# Altium PCB Sensor_Box_PWR_AC.PCBDOC
Units mm, origin at the board's own origin, x right, y up, seen from the top; angles counter-clockwise.
Board outline 33.95 x 73.05 mm, 2 copper layers (Top, Bot), stack 1.571 mm thick; 19 components, 18 nets, 61 pads, 36 vias.
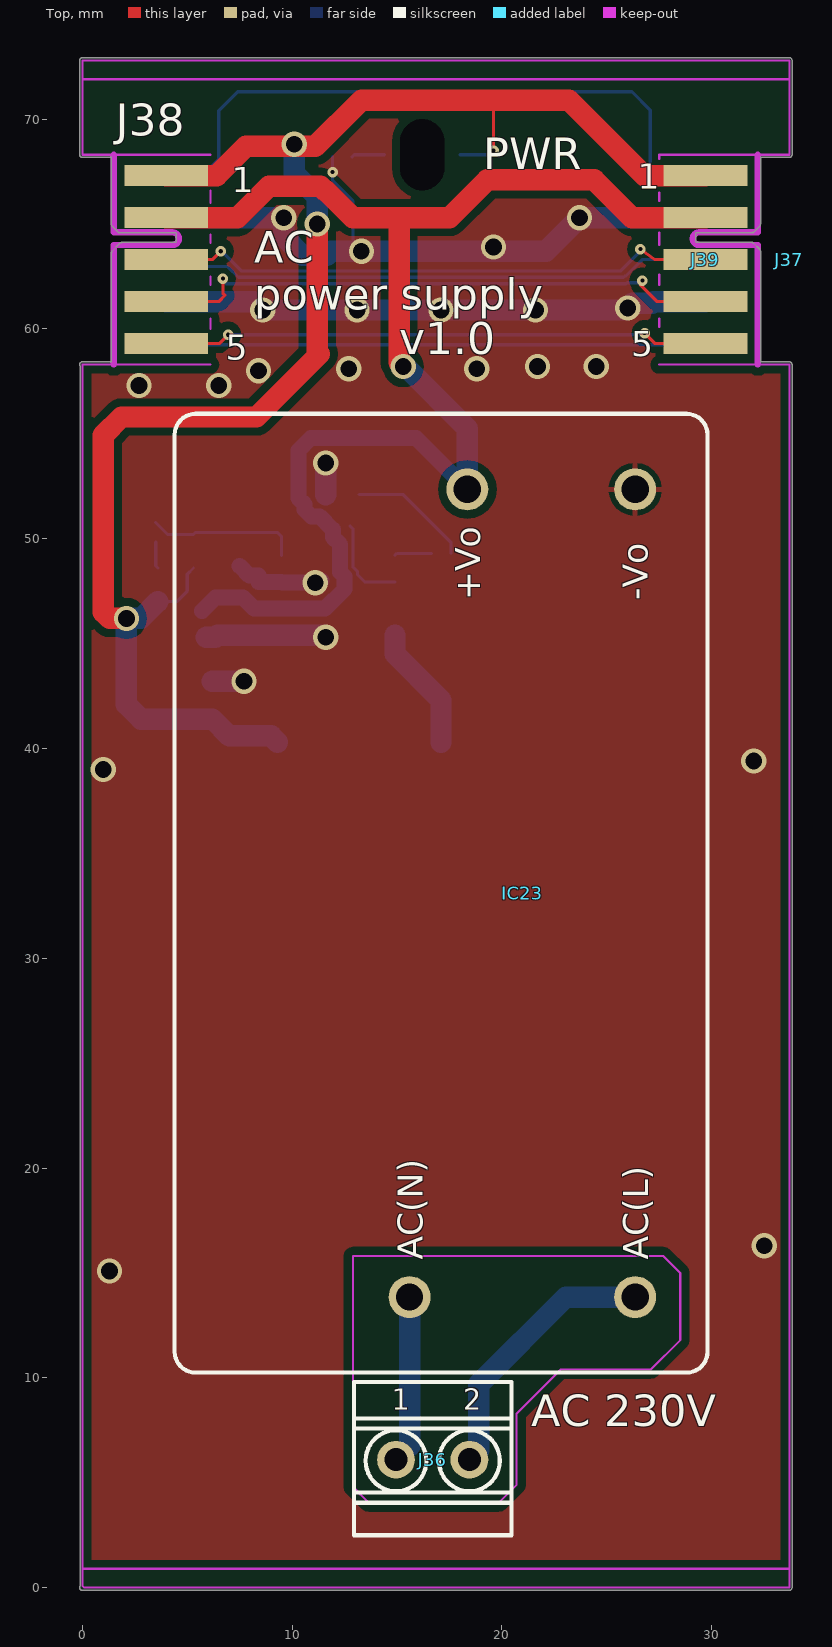
[diagram p0: Top view]
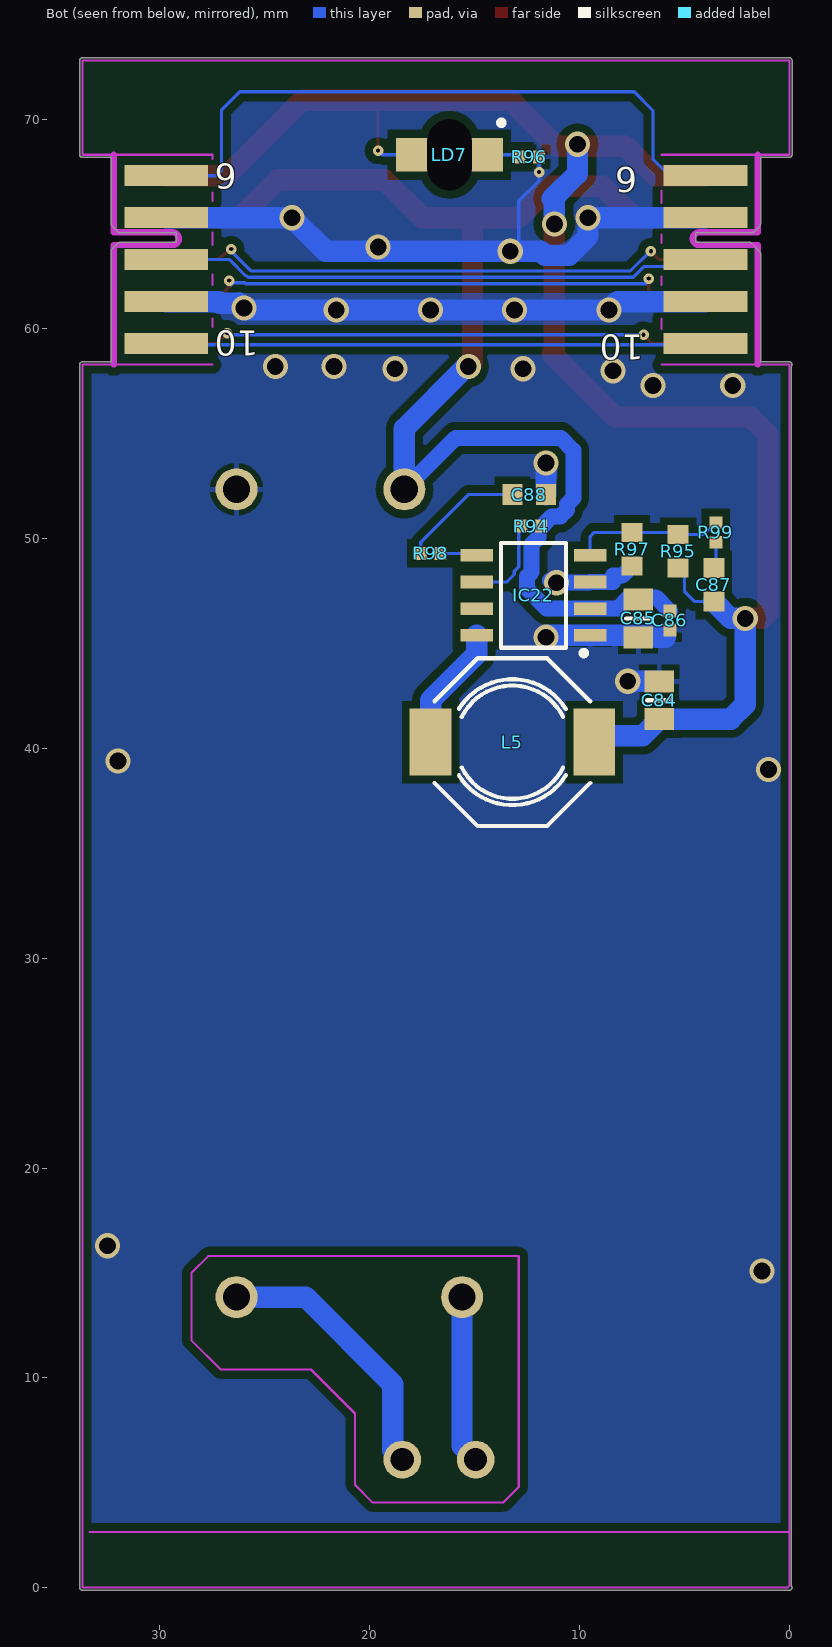
[diagram p1: Bot view, seen from below]
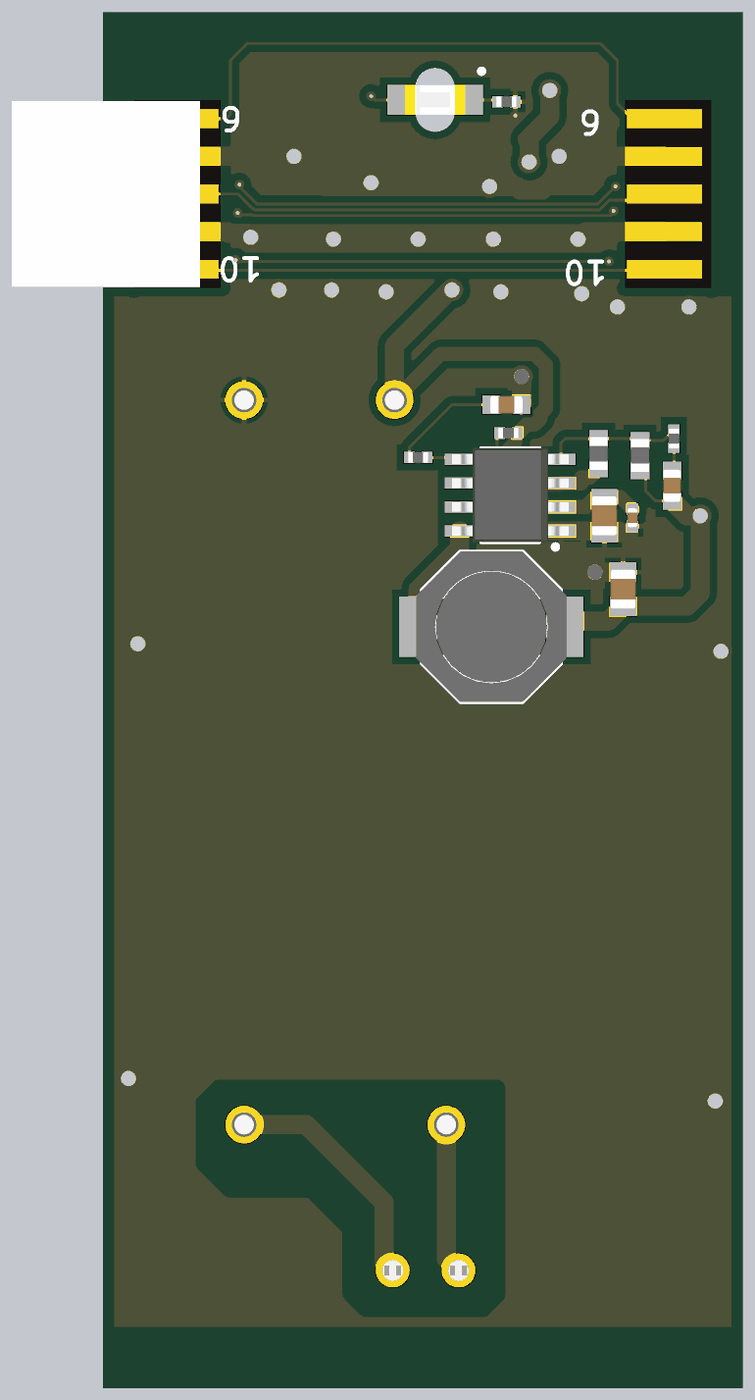
[diagram p2: 3D render of the assembled board from below, using the file's embedded part models]

## Layer stack, top to bottom
TopSolder: solder mask 0.0102, Solder Resist, Dk 3.5
Top: signal copper 0.0356
Dielectric1: core 1.5, FR-4, Dk 4.8
Bot: signal copper 0.0356
BottomSolder: solder mask 0.0102, Solder Resist, Dk 3.5

## Board outline
0,-0.127 cw(c0,0) -0.1,0.078 -0.1,58.222 cw(c0,58.3) 0,58.427 1.373,58.427 1.373,63.6 cw(c1.5,63.6) 1.41,63.69 1.81,64.09 1.809,64.09 cw(c1.9,64) 1.9,64.127 4.473,64.127 4.473,64.573 1.8,64.573 cw(c1.8,64.7) 1.709,64.61 1.71,64.61 1.41,64.91 1.41,64.909 cw(c1.5,65) 1.373,65 1.373,68.173 0,68.173 cw(c0,68.3) -0.127,68.3 -0.127,72.8 cw(c0,72.8) 0,72.927 33.7,72.927 cw(c33.7,72.8) 33.827,72.8 33.827,68.3 cw(c33.7,68.3) 33.7,68.173 32.327,68.173 32.327,65 cw(c32.2,65) 32.29,64.909 32.29,64.91 31.99,64.61 31.991,64.61 cw(c31.9,64.7) 31.9,64.573 29.227,64.573 29.227,64.127 31.9,64.127 cw(c31.9,64) 31.991,64.09 31.99,64.09 32.29,63.79 cw(c32.2,63.7) 32.327,63.7 32.327,58.427 33.7,58.427 cw(c33.7,58.3) 33.827,58.3 33.827,0 cw(c33.7,0) 33.7,-0.127

## Design rules (kind name [scope] priority, off if disabled: settings)
Clearance Clearance_DIFF [(InDifferentialPairClass('All Differential Pairs'))] p1: gap=0.127 ignorepadtopadclearanceinfootprint=FALSE except(0: Arc-Hole Track-Hole SMDPad-Hole THPad-Hole Via-Hole Fill-Hole Poly-Hole Region-Hole Text-Hole; 0.254: Arc-Poly Track-Poly SMDPad-Poly THPad-Poly Via-Poly Fill-Poly Poly-Poly Poly-Region Poly-Text)
Clearance [All] p2: gap=0.152 ignorepadtopadclearanceinfootprint=FALSE except(0.381: Arc-Poly Track-Poly SMDPad-Poly THPad-Poly Via-Poly Fill-Poly Poly-Poly)
DiffPairsRouting [All] p1: maxlimit=0.254 minlimit=0.127 mostfreqgap=0.127 toplayer_minwidth=0.127 toplayer_maxwidth=0.381 toplayer_prefwidth=0.254 bottomlayer_minwidth=0.127 bottomlayer_maxwidth=0.381 bottomlayer_prefwidth=0.254 maxuncoupledlength=12.7
FabricationTestPointUsage TestPointUsage [All] p1: valid=0 allowmultiple=FALSE
FabricationTestpoint Testpoint [All] p1: side=3 testpointundercomponent=TRUE minsize=1.016 maxsize=2.54 preferedsize=1.524 minholesize=0.508 maxholesize=1.016 preferedholesize=0.813 testpointgrid=0.025 allowsidetop=TRUE allowsidebottom=TRUE usegrid=TRUE gridtolerance=0
HoleSize [All] p1: absolutevalues=TRUE maxlimit=3.81 minlimit=0.025 maxpercent=80.000 minpercent=20.000
HoleToHoleClearance [All] p1: gap=0.025 allowstackedmicrovias=TRUE
MinimumSolderMaskSliver [All] p1: minsoldermaskwidth=0
PlaneClearance [All] p1: clearance=0.254
PlaneConnect [All] p1: planeconnectstyle=Direct reliefexpansion=0.508 reliefentries=4 reliefconductorwidth=0.254 reliefairgap=0.254
PolygonConnect PolygonConnect_pad [(InPadClass('All Pads'))] p1: connectstyle=Relief reliefconductorwidth=0.254 reliefentries=4 polygonreliefangle="90 Angle" airgapwidth=0.254
PolygonConnect [All] p2: connectstyle=Direct reliefconductorwidth=0.254 reliefentries=4 polygonreliefangle="45 Angle" airgapwidth=0.254
RoomDefinition Sensor_Box_PWR_AC [InComponentClass('Sensor_Box_PWR_AC')] p1 off: confinementstyle=ConfineIn formatcopy=TRUE lockcomponents=FALSE outline 81.85,15.15 264.599,15.15 264.599,38.9 81.85,38.9
RoutingVias [All] p1: holewidth=0.2 width=0.5 viastyle="Through Hole" minholewidth=0.2 minwidth=0.5 maxholewidth=0.8 maxwidth=1.3
SilkToSilkClearance [All] p1: silktosilkclearance=0
SilkToSolderMaskClearance SilkscreenOverComponentPads [IsPad] p1: minsilkscreentomaskgap=0 clearancetoexposedcopper=TRUE
SolderMaskExpansion [All] p1: expansion=0.051
Width [All] p1: maxlimit=1.27 minlimit=0.127 preferedwidth=0.127
20 further rules are at their usual default settings.

## Components (designator, comment, footprint, x,y, rotation, side; value= is the part's Value field where it differs from the comment)
C84 "10uF" CAPC2012X135N 6.2,42.3 r90 bottom
C85 "10uF" CAPC2012X135N 7.2,46.2 r90 bottom
C86 "100nF" CAPC1005X55N 5.7,46.1 r90 bottom
C87 "150pF" CAPC1608X87N 3.6,47.8 r270 bottom
C88 "3.9nF" CAPC1608X87N 12.4,52.1 r0 bottom
IC22 "NCP3170ADR2G" SOIC127P600X175-8N 12.2,47.3 r0 bottom
IC23 "IRM-10-12" PWS_MEANWELL_IRM-10 17.1,33.1 r90 top
J36 "=Family" PHOENIX_1751248 16.7,6.1 r0 top
J37 "=Family" "AVX_00 9159 010 061 916" 33.7,63.3 r0 top
J38 "=Family" EDGE10T1B6_P200W1000L0F100X400 4,67.3 r270 top
J39 "=Family" EDGE10T5B10_P200W1000L0F100X400 29.7,59.3 r90 top
L5 "6.8uH" IND_BOURNS_SRU8043 13.2,40.3 r180 bottom
LD7 "Green" LED_KINGBRIGHT_KPTR3216 16.2,68.3 r180 bottom
R94 "10k" RESC1005X40N 12.3,50.6 r0 bottom
R95 "43k" RESC1608X55N 5.3,49.4 r270 bottom
R96 "1k" RESC1005X40N 12.4,68.2 r0 bottom
R97 "8k2" RESC1608X55N 7.5,49.5 r270 bottom
R98 "10k" RESC1005X40N 17.1,49.3 r180 bottom
R99 "1k" RESC1005X40N 3.5,50.3 r270 bottom

## Footprints (in the part's own frame and the unit in brackets; to place one, negate y for a bottom-side part, rotate by r counter-clockwise, add the part's x,y. Pads: shape width x height; smd on the part's side, far side on the other; paste and mask are expansions set on the pad)
"AVX_00 9159 010 061 916" [mm] "10 Contacts, 2mm Pitch, Open Ended Card Edge Connector, 9159 Series"
  body extent -5,-4.95 5,4.95, height 1.7
CAPC1005X55N [mm] "Chip Capacitor, Body 1.0x0.55mm, IPC Medium Density"
  rect 0.62x0.62 smd: 1(-0.45,0) 2(0.45,0)
  body extent -0.52,-0.27 0.53,0.28, height 0.55
CAPC1608X87N [mm] "Chip Capacitor, Body 1.6x0.8mm IPC Medium Density"
  rect 0.95x1 smd: 1(-0.8,0) 2(0.8,0)
  body extent -0.87,-0.47 0.88,0.48, height 0.87
CAPC2012X135N [mm] "Chip Capacitor, Body 2.0x1.25mm, IPC Medium Density"
  rect 1.05x1.4 smd: 1(-0.9,0) 2(0.9,0)
  silkscreen extent 0,-0.58 0,0.58, body extent -1.05,-0.67 1.05,0.68, height 1.25
EDGE10T1B6_P200W1000L0F100X400 [mm] "10 contacts Board Edge Connector, First Left Top Pad 1, First Left Bottom Pad 2, Pitch 2mm, Length 0mm, Width 10mm, Finger Lenght 4mm, Finger Width 1mm"
  rect 1x4 smd paste-0.5: 1(0,0) 2(2,0) 3(4,0) 4(6,0) 5(8,0)
  rect 1x4 smd far side paste-0.5: 6(0,0) 7(2,0) 8(4,0) 9(6,0) 10(8,0)
  KeepOutLayer lines w0.3: 9,-2.5 3.3,-2.5 3.3,0.3 ccw(c3,0.3) 2.7,0.3 2.7,-2.5 -1,-2.5
EDGE10T5B10_P200W1000L0F100X400 [mm] "10 contacts Board Edge Connector, First Left Top Pad 5, First Left Bottom Pad 10, Pitch 2mm, Length 0mm, Width 10mm, Finger Lenght 4mm, Finger Width 1mm"
  rect 1x4 smd paste-0.5: 1(8,0) 2(6,0) 3(4,0) 4(2,0) 5(0,0)
  rect 1x4 smd far side paste-0.5: 6(8,0) 7(6,0) 8(4,0) 9(2,0) 10(0,0)
  KeepOutLayer lines w0.3: -1,-2.5 4.7,-2.5 4.7,0.3 cw(c5,0.3) 5.3,0.3 5.3,-2.5 9,-2.5
IND_BOURNS_SRU8043 [mm] "SMD Inductor Body Width 8.3mm Body Lenght 8.3mm Height 4.6mm"
  rect 2x3.2 smd: 1(-3.9,0) 2(3.9,0)
  silkscreen extent -3.71,-4 3.71,4, body extent -4,-4 4,4, height 4.3
LED_KINGBRIGHT_KPTR3216 [mm] "Reverse Mount LED 3216, Hole 2.1x2.3mm 0.35mm Height"
  rect 1.5x1.6 smd: 1(1.8,0) 2(-1.8,0)
  oval 1.9x3.2 hole 2.1 slot 3.4 at 90 deg unplated mask+0.1: 3(0,0)
  silkscreen extent 2.35,1.4 2.6,1.65, body extent -1.6,-0.8 1.6,0.8, height 0.25
PHOENIX_1751248 [mm] "Terminal Block, 10A 160V, Pitch 3.5mm, 2 Positions, Screw Connection"
  round 1.8 hole 1.1: 1(-1.75,0) 2(1.75,0)
  silkscreen extent -3.75,-3.6 3.75,3.7, body extent -3.75,-3.6 3.75,3.7, height 8.5
PWS_MEANWELL_IRM-10 [mm] "IRM-10 Series, Body 45.7x25.4mm, Power Supply"
  round 2 hole 1.3: 1(-19.25,1.5) 2(-19.25,-9.25) 3(19.25,-1.25) 4(19.25,-9.25)
  silkscreen extent -22.85,-12.7 22.85,12.7, body extent -22.85,-12.7 22.85,12.7, height 21.5
RESC1005X40N [mm] "Chip Resistor, EIA 0402, Metric 1005, Body 1.0x0.5mm, IPC Medium Density"
  rect 0.58x0.62 smd: 1(-0.47,0) 2(0.47,0)
  body extent -0.52,-0.27 0.53,0.28, height 0.4
RESC1608X55N [mm] "Chip Resistor, EIA 0603, Metric 1608, Body 1.6x0.8mm, IPC Medium Density"
  rect 0.9x1 smd: 1(-0.8,0) 2(0.8,0)
  body extent -0.87,-0.47 0.88,0.48, height 0.55
SOIC127P600X175-8N [mm] "SOIC 8, Pitch 1.27mm - Body 4x5mm, IPC Medium Density"
  rect 1.55x0.6 smd: 1(-2.7,1.905) 2(-2.7,0.635) 3(-2.7,-0.635) 4(-2.7,-1.905) 5(2.7,-1.905) 6(2.7,-0.635) 7(2.7,0.635) 8(2.7,1.905)
  silkscreen extent -2.52,-2.5 1.55,2.88, body extent -3.1,-2.5 3.1,2.5, height 1.75

## Part data
C84 C85: library part CC0805_10UF_16V_10%_X5R, "Non-polarised capacitor", Case=0805, Manufacturer=GENERIC, Manufacturer1 ComponentHeight=1.4mm, Manufacturer1 Example=KEMET, Manufacturer1 Part Number=C0805C106K4PAC, Tolerance=±10%, Voltage=16V, Author="CERN DEM JLC", Component Type=Standard, CreateDate=03.12.2007, HelpURL=\\cern.ch\dfs\Applications\Altium\Datasheets\CC1206_X5R_KEMET.pdf, LatestRevisionDate=03.12.2007, Manufacturer Part Number=CC0805_10UF_16V_10%_X5R, Mounted=Yes, Part Description="SMD Multilayer Chip Ceramic Capacitor", Part Number=CC0805_10UF_16V_10%_X5R, Pin Count=2, Sense=No, SMD=Yes, Socket=No, Status=Preferred, TC=X5R
C86: library part CC0402_100NF_16V_10%_X5R, "Non-polarised capacitor", Case=0402, Manufacturer=GENERIC, Manufacturer1 ComponentHeight=0.55mm, Manufacturer1 Example=MURATA, Manufacturer1 Part Number=GRM155R61C104KA88D, Tolerance=±10%, Voltage=16V, Author="CERN DEM JLC", Component Type=Standard, CreateDate=10.12.2013, HelpURL=\\cern.ch\dfs\Applications\Altium\Datasheets\CC0402_X5R_MURATA_GRM.pdf, LatestRevisionDate=10.12.2013, Manufacturer Part Number=CC0402_100NF_16V_10%_X5R, Mounted=Yes, Part Description="SMD Multilayer Chip Ceramic Capacitor", Part Number=CC0402_100NF_16V_10%_X5R, Pin Count=2, Sense=No, SMD=Yes, Socket=No, Status=None, TC=X5R
C87: library part CC0603_150PF_50V_1%_NP0, "Non-polarised capacitor", Case=0603, Manufacturer=GENERIC, Manufacturer1 ComponentHeight=0.7mm, Manufacturer1 Example=PHYCOMP, Manufacturer1 Part Number=CC0603FRNPO9BN151, Tolerance=±1%, Voltage=50V, Author="CERN DEM MR", Component Type=Standard, CreateDate=17.02.2016, HelpURL=\\cern.ch\dfs\Applications\Altium\Datasheets\CC0805_NP0_PHYCOMP_16VTO50V.pdf, LatestRevisionDate=17.02.2016, Manufacturer Part Number=CC0603_150PF_50V_1%_NP0, Mounted=Yes, Part Description="SMD Multilayer Chip Ceramic Capacitor", Part Number=CC0603_150PF_50V_1%_NP0, Pin Count=2, Sense=No, SMD=Yes, Socket=No, Status=None, TC=C0G/NP0
C88: library part CC0603_3.9NF_50V_5%_X7R, "Non-polarised capacitor", Case=0603, Manufacturer=GENERIC, Manufacturer1 ComponentHeight=0.87mm, Manufacturer1 Example=PHYCOMP, Manufacturer1 Part Number=223858615631, Tolerance=±5%, Voltage=50V, Author="CERN DEM JLC", Component Type=Standard, CreateDate=03.12.2007, HelpURL=\\cern.ch\dfs\Applications\Altium\Datasheets\CC0603_X7R_PHYCOMP.pdf, LatestRevisionDate=03.12.2007, Manufacturer Part Number=CC0603_3.9NF_50V_5%_X7R, Mounted=Yes, Part Description="SMD Multilayer Chip Ceramic Capacitor", Part Number=CC0603_3.9NF_50V_5%_X7R, Pin Count=2, Sense=No, SMD=Yes, Socket=No, Status=Preferred, TC=X7R
IC22: "Synchronous PWM Switching Converter", Case=SOIC8, Manufacturer="ON SEMICONDUCTOR", Author="CERN DEM MR", Bonding=No, ComponentHeight=1.75mm, Component Type=Standard, CreateDate=30.05.2016, Device=NCP3170ADR2G, HelpURL=\\cern.ch\dfs\Applications\Altium\Datasheets\NCP3170ADR2G.pdf, LatestRevisionDate=30.05.2016, Manufacturer Part Number=NCP3170ADR2G, Mounted=Yes, PackageDescription="SOIC 8, Pitch 1.27mm - Body 4x5mm, IPC Medium Density", Part Description="Synchronous PWM Switching Converter", Part Number=NCP3170ADR2G, Pin Count=8, PressFit=No, Sense=No, SMD=Yes, Socket=No
IC23: "Power Supply", Manufacturer="MEAN WELL", Author="CERN DEM MR", Bonding=No, ComponentHeight=21.5mm, Component Type=Standard, CreateDate=14.02.2018, Device=IRM-10-12, HelpURL=\\cern.ch\dfs\Applications\Altium\Datasheets\IRM-10-12.pdf, LatestRevisionDate=14.02.2018, Manufacturer Part Number=IRM-10-12, Mounted=Yes, PackageDescription="IRM-10 Series, Body 45.7x25.4mm, Power Supply", Part Description="85-264VAC To 12VDC (850mA) 10.2W Power Supply", Part Number=IRM-10-12, Pin Count=4, PressFit=No, Sense=No, SMD=No, Socket=No, Status=None
J36: library part PHOENIX_1751248, "Terminal Block, 2 Positions, Screw Connection", Manufacturer="PHOENIX CONTACT", Manufacturer Part Number="1751248 (MKDS 1/ 2-3,5)", Author="CERN DEM JLC", ComponentHeight=8.5mm, Component Type=Standard, CreateDate=03.11.2009, HelpURL=\\cern.ch\dfs\Applications\Altium\Datasheets\PHOENIX_1751248.pdf, LatestRevisionDate=26.04.2010, Mounted=Yes, Part Description="10A 160V, Terminal Block, Pitch 3.5mm, 2 Positions, Screw Connection", Part Number=PHOENIX_1751248, Pin Count=2, PressFit=No, Sense=No, SMD=No, Socket=No, Status=None
J37: library part "AVX_00 9159 010 061 916", "Open Ended Card Edge Connector, 9159 Series", Manufacturer=AVX, Manufacturer Part Number="00 9159 010 061 916", Author="CERN DEM MR", ComponentHeight=1.6mm, Component Type=Standard, CreateDate=13.02.2018, HelpURL="\\cern.ch\dfs\Applications\Altium\Datasheets\AVX_00 9159 010 061 916.pdf", LatestRevisionDate=13.02.2018, Mounted=Yes, Part Description="10 Contacts, 2mm Pitch, Open Ended Card Edge Connector, 9159 Series", Part Number="AVX_00 9159 010 061 916", Pin Count=10, PressFit=No, Sense=No, SMD=No, Socket=No, Status=None
J38: library part EDGE10T1B6_P200W1000L0F100X400, "PCB Edge Connector 10 (2x5)", Author="CERN DEM MR", ComponentHeight=0mm, Component Type="Standard (No BOM)", CreateDate=14.02.2018, HelpURL=\\cern.ch\dfs\Applications\Altium\Datasheets\EDGE10T1B6_P200W1000L0F100X400.pdf, LatestRevisionDate=14.02.2018, Mounted=No, Part Description="10 Contacts Board Edge Connector, Pitch 2mm, Length 0mm, Width 10mm, Finger Lenght 4mm, Finger Width 1mm", Part Number=EDGE10T1B6_P200W1000L0F100X400, Pin Count=10, PressFit=No, Sense=No, SMD=No, Socket=No, Status=None
J39: library part EDGE10T5B10_P200W1000L0F100X400, "PCB Edge Connector 10 (2x5)", Author="CERN DEM MR", ComponentHeight=0mm, Component Type="Standard (No BOM)", CreateDate=14.02.2018, HelpURL=\\cern.ch\dfs\Applications\Altium\Datasheets\EDGE10T5B10_P200W1000L0F100X400.pdf, LatestRevisionDate=14.02.2018, Mounted=No, Part Description="10 Contacts Board Edge Connector, Pitch 2mm, Length 0mm, Width 10mm, Finger Lenght 4mm, Finger Width 1mm", Part Number=EDGE10T5B10_P200W1000L0F100X400, Pin Count=10, PressFit=No, Sense=No, SMD=No, Socket=No, Status=None
L5: library part IND_6.8UH_30%_BOURNS_SRU8043, "Inductor", Manufacturer=BOURNS, Manufacturer Part Number=SRU8043-6R8Y, Power=3.8A, Resistance=0.0224R, Tolerance=±30%, Author="CERN DEM JMW", ComponentHeight=4.6mm, Component Type=Standard, CreateDate=06.08.2015, HelpURL=\\cern.ch\dfs\Applications\Altium\Datasheets\IND_BOURNS_SRU8043.pdf, LatestRevisionDate=06.08.2015, Mounted=Yes, Part Description="Shielded SMD Power Inductor", Part Number=IND_6.8UH_30%_BOURNS_SRU8043, Pin Count=2, Sense=No, SMD=Yes, Socket=No, Status=None
LD7: library part LED_KINGBRIGHT_KPTR-3216CGCK, "LED Green 1A 2C", Manufacturer=KINGBRIGHT, Manufacturer Part Number=KPTR-3216CGCK, Author="CERN DEM MR", Bonding=No, Color=Green, ComponentHeight=0.35mm, Component Type=Standard, CreateDate=15.02.2016, HelpURL=\\cern.ch\dfs\Applications\Altium\Datasheets\LED_KINGBRIGHT_KPTR-3216CGCK.pdf, LatestRevisionDate=15.02.2016, Mounted=Yes, PackageDescription="Reverse Mount LED 3216, Hole 2.1x2.3mm 0.35mm Height", Part Description="Reverse Mount LED 1.4x1.6mm Green", Part Number=LED_KINGBRIGHT_KPTR-3216CGCK, Pin Count=2, PressFit=No, Sense=No, SMD=Yes, Socket=No
R94 R98: library part R0402_10K_1%_0.0625W_100PPM, "Resistor - 1%", Case=0402, Manufacturer=GENERIC, Manufacturer1 ComponentHeight=0.4mm, Manufacturer1 Example="YAGEO PHYCOMP", Manufacturer1 Part Number=232270671003L, Power=0.0625W, Tolerance=±1%, Author="CERN DEM JLC", Component Type=Standard, CreateDate=03.12.2007, HelpURL=\\cern.ch\dfs\Applications\Altium\Datasheets\R0402_Phycomp_RC0402.pdf, LatestRevisionDate=17.10.2012, Manufacturer Part Number=R0402_10K_1%_0.0625W_100PPM, Mounted=Yes, Part Description="General Purpose Thick Film Chip Resistor", Part Number=R0402_10K_1%_0.0625W_100PPM, Pin Count=2, PressFit=No, Sense=No, SMD=Yes, Socket=No, Status="Not Recommended", TC=±100ppm/°C
R95: library part R0603_43K_1%_0.1W_100PPM, "Resistor - 1%", Case=0603, Manufacturer=GENERIC, Manufacturer1 ComponentHeight=0.55mm, Manufacturer1 Example="NIC COMPONENT", Manufacturer1 Part Number=NRC06F4302TRF, Power=0.1W, Tolerance=±1%, Author="CERN DEM JLC", Component Type=Standard, CreateDate=03.12.2007, HelpURL=\\cern.ch\dfs\Applications\Altium\Datasheets\R0603_NIC_NRC.pdf, LatestRevisionDate=13.03.2008, Manufacturer Part Number=R0603_43K_1%_0.1W_100PPM, Mounted=Yes, Part Description="General Purpose Thick Film Chip Resistor", Part Number=R0603_43K_1%_0.1W_100PPM, Pin Count=2, PressFit=No, Sense=No, SMD=Yes, Socket=No, Status=Preferred, TC=±100ppm/°C
R96 R99: library part R0402_1K_1%_0.0625W_100PPM, "Resistor - 1%", Case=0402, Manufacturer=GENERIC, Manufacturer1 ComponentHeight=0.4mm, Manufacturer1 Example="YAGEO PHYCOMP", Manufacturer1 Part Number=232270671002L, Power=0.0625W, Tolerance=±1%, Author="CERN DEM JLC", Component Type=Standard, CreateDate=03.12.2007, HelpURL=\\cern.ch\dfs\Applications\Altium\Datasheets\R0402_Phycomp_RC0402.pdf, LatestRevisionDate=17.10.2012, Manufacturer Part Number=R0402_1K_1%_0.0625W_100PPM, Mounted=Yes, Part Description="General Purpose Thick Film Chip Resistor", Part Number=R0402_1K_1%_0.0625W_100PPM, Pin Count=2, PressFit=No, Sense=No, SMD=Yes, Socket=No, Status="Not Recommended", TC=±100ppm/°C
R97: library part R0603_8K2_1%_0.1W_100PPM, "Resistor - 1%", Case=0603, Manufacturer=GENERIC, Manufacturer1 ComponentHeight=0.55mm, Manufacturer1 Example="NIC COMPONENT", Manufacturer1 Part Number=NRC06F8201TRF, Power=0.1W, Tolerance=±1%, Author="CERN DEM JLC", Component Type=Standard, CreateDate=03.12.2007, HelpURL=\\cern.ch\dfs\Applications\Altium\Datasheets\R0603_NIC_NRC.pdf, LatestRevisionDate=13.03.2008, Manufacturer Part Number=R0603_8K2_1%_0.1W_100PPM, Mounted=Yes, Part Description="General Purpose Thick Film Chip Resistor", Part Number=R0603_8K2_1%_0.1W_100PPM, Pin Count=2, PressFit=No, Sense=No, SMD=Yes, Socket=No, Status=Preferred, TC=±100ppm/°C

## Via types
v1: diameter 1.2, hole 0.8, Top to Bot, tented both sides, 28 vias
v2: diameter 0.5, hole 0.2, Top to Bot, tented both sides, 8 vias

## Nets (pads, with @x,y where several pads share a name; then routed paths per layer and width w, separated by ;. In a path a pad name is that pad's centre, name@x,y a point inside that pad or via, vN(x,y) a via of type N, cw(c..) or ccw(c..) an arc to the next point about the centre after c; other vN are vias at no path point)
GND: C84.2 C85.1 C86.1 C88.1 IC22.1 IC22.3 IC23.4 J38.9 J39.9 R96.1 R97.2 | length 71.9
  Bot w0.152: R96.1 v2(11.93,67.47) 11.93,67.07 12.9,66.1 v1@12.9,63.7
  Bot w0.762: R97.2 7.967,48.233 8.408,48.233 8.408,47.935 IC22.3 9.535,47.9 v1(11.1,47.9) 11.3,47.9 v1@11.4,48
  Bot w1.016: J38.9 8.2,61.3 v1(8.6,60.9) v1(13.1,60.9) v1(17.1,60.9) v1(21.6,60.9) 25.9,60.9 v1(26,61) 26.224,61.224 26.233,61.215 27.166,61.215 27.236,61.285 29.685,61.285 J39.9 ; 4,65.3 v1(9.6,65.3) 9.6,64.4 10.5,63.5 11.647,63.5 11.847,63.7 12.9,63.7 v1(13.3,63.7) 22.1,63.7 v1(23.7,65.3) 29.7,65.3 ; 5.9,45.3 6.35,45.3 6.445,45.395 IC22.1 11.505,45.395 v1(11.6,45.3) ; C84.2 v1(7.7,43.2) ; C88.1 v1(11.6,53.6)
  other v1: 1.3,15.1 32.5,16.3 1,39 32,39.4 2.7,57.3 6.5,57.3 8.4,58 12.7,58.1 18.8,58.1 21.7,58.2 24.5,58.2 19.6,63.9
NetC87_1: C87.1 R99.2 | length 1.3
  Bot w0.152: R99.2 3.5,48.7 C87.1
NetC88_2: C88.2 R98.1 | length 5.8
  Bot w0.152: C88.2 15.3,52.1 17.57,49.83 R98.1
NetIC22_4: IC22.4 R95.1 R97.1 R99.1 | length 7.3
  Bot w0.152: R99.1 4.07,50.2 R95.1 5.4,50.3 R97.1 9.3,50.3 9.5,50.1 IC22.4
NetIC22_5: IC22.5 R98.2 | length 1.8
  Bot w0.152: IC22.5 14.995,49.3 R98.2
NetIC22_6: IC22.6 R94.2 | length 4.4
  Bot w0.152: R94.2 12.899,50.471 12.899,48.657 13.11,48.446 13.11,48.29 13.465,47.935 IC22.6
NetIC22_8: IC22.8 L5.1 | length 6
  Bot w1.016: IC22.8 14.9,44.5 17.1,42.3 L5.1
NetIC23_1: IC23.1 J36.1 | length 8
  Bot w1.016: J36.1 15.6,6.75 IC23.1
NetIC23_2: IC23.2 J36.2 | length 13
  Bot w1.016: J36.2 18.9,6.55 18.9,9.7 23.05,13.85 IC23.2
NetJ38_3: J38.3 J39.3 | length 26.9
  Top w0.152: J38.3 6.2,63.3 v2(6.6,63.7) ; v2(26.6,63.8) 27.3,63.3 J39.3
  Bot w0.152: v2(6.6,63.7) 6.636,63.7 7.573,62.763 25.663,62.763 26.6,63.7 v2(26.6,63.8)
NetJ38_4: J38.4 J39.4 | length 27.8
  Top w0.152: J38.4 6.5,61.3 6.8,61.6 6.7,61.7 v2(6.7,62.4) ; v2(26.7,62.3) 26.7,62.2 26.6,62.1 27.4,61.3 J39.4
  Bot w0.152: v2(6.7,62.4) 6.7,62.3 6.846,62.154 25.916,62.154 25.962,62.2 26.5,62.2 26.6,62.1 26.7,62.2 v2(26.7,62.3)
NetJ38_5: J38.5 J39.5 | length 26.1
  Top w0.152: J38.5 6.53,59.3 v2(6.95,59.72) ; v2(26.8,59.8) 27.3,59.3 J39.5
  Bot w0.152: v2(6.95,59.72) 26.72,59.72 v2(26.8,59.8)
NetJ38_6: J38.6 J39.6 | length 32.1
  Bot w0.152: J38.6 5.712,67.3 6.5,68.088 6.5,70.4 7.4,71.3 26.2,71.3 27.071,70.429 27.071,67.529 27.3,67.3 J39.6
NetJ38_8: J38.8 J39.8 | length 26.4
  Bot w0.152: J38.8 4.33,62.97 6.935,62.97 7.446,62.459 25.79,62.459 25.852,62.521 25.901,62.521 26.68,63.3 J39.8
NetJ38_10: J38.10 J39.10 | length 25.7
  Bot w0.152: J38.10 4.059,59.241 29.641,59.241 J39.10
NetLD7_1: LD7.1 R96.2 | length 1.6
  Bot w0.152: R96.2 12.97,68.3 LD7.1
P5V0: C84.1 C87.2 J38.1 J39.1 L5.2 LD7.2 R95.2 | length 81.6
  Top w0.152: v2(19.6,68.5) 19.6,70.9
  Top w1.016: v1(2.1,46.2) 1.3,46.2 1,46.5 1,54.93 1.87,55.8 8.3,55.8 11.3,58.8 11.2,58.9 v1(11.2,65) ; J38.1 6.4,67.3 7.8,68.7 11.106,68.7 13.306,70.9 19.6,70.9 23.2,70.9 26.8,67.3 J39.1
  Bot w0.152: C87.2 4.5,47 5,47.5 5,48.3 R95.2 ; LD7.2 19.4,68.3 v2(19.6,68.5)
  Bot w1.016: C87.2 2.8,46.2 v1(2.1,46.2) 2.1,42.1 2.8,41.4 C84.1 7,40.6 9,40.6 L5.2 ; v1(10.1,68.8) 10.1,67.4 11.3,66.2 11.2,66.1 v1(11.2,65)
P12V0: C85.2 C86.2 IC22.2 IC23.3 J38.2 J39.2 R94.1 | length 67.5
  Top w1.016: J38.2 6.5,65.3 ; 6.502,65.298 7.398,65.298 8.9,66.8 11.348,66.8 11.563,66.585 11.615,66.585 12.9,65.3 15.1,65.3 ; v1(15.3,58.2) 15.1,58.4 15.1,65.3 ; J39.2 26.2,65.3 24.4,67.1 19.3,67.1 17.5,65.3 15.1,65.3
  Bot w0.762: C86.2 6.35,47.2 7.65,47.2 8.185,46.665 IC22.2 11.565,46.665 12.5,47.6 12.5,48.193 12.289,48.404 12.289,49.727 11.947,50.069 11.947,50.428 11.316,51.059 10.912,51.059 10.592,51.379 10.592,51.636 10.3,51.927 10.3,54.2 10.9,54.8 15.9,54.8 IC23.3
  Bot w1.016: v1(15.3,58.2) 15.4,58.2 18.35,55.25 IC23.3
pads on no net: IC22.7 J38.7 J39.7 LD7.3

## Polygon pours and split planes (outlines as drawn)
GND on Bot "Signal Layer 1-No Net 1" (solid, remove dead copper, pour order 2): 33.7,72.8 33.7,2.5 33.55,2.65 0.2,2.65 0,2.85 0,72.8
GND on Top "Signal Layer 1-No Net 1" (solid, remove dead copper, pour order 0): 0,72.8 33.7,72.8 33.7,0 33.6,0.1 0,0.1

## Keep-outs
Top:
  lines w0.1: 0,0.9 33.7,0.9 ; 0,71.9 33.7,71.9
Bot:
  lines w0.1: 0,2.65 33.35,2.65
KeepOutLayer:
  lines w0.1: 6.1,58.3 0,58.3 ; 6.1,60 6.1,60.5 ; 6.1,62.1 6.1,62.5 ; 6.1,64.1 6.1,64.5 ; 6.1,66 6.1,66.6 ; 27.5,60.1 27.5,60.5 ; 27.5,62.1 27.5,62.6 ; 27.5,64 27.5,64.6 ; 27.5,66.1 27.5,66.5 ; 27.5,68.1 27.5,68.3 27.7,68.3 33.7,68.3 33.7,72.8 0,72.8 ; 0,58.3 0,58.3 ; 0,58.3 0,0.1 0.1,0 33.7,0 ; 0,72.8 0,68.3 1.5,68.3 6.1,68.3 ; 0,72.8 0,72.8 ; 6.1,68.3 6.1,68.3 ; 27.5,58.3 33.7,58.3 33.7,0 ; 27.5,58.3 27.5,58.3 ; 33.7,0 33.7,0 ; 12.9,4.8 12.9,15.8 27.7,15.8 28.5,15 28.5,11.8 27.1,10.4 22.8,10.4 20.7,8.3 20.7,4.9 19.851,4.051 13.649,4.051 12.9,4.8

## Silkscreen, mask and mechanical layers (free items; w line width, h text height)
TopOverlay:
  text "PWR" at 19.1,67.6 h1.5
  text "AC  / power supply" at 8.2,60.9 h1.5
  text "v1.0" at 15.1,58.8 h1.52
  text "AC 230V" at 21.4,7.7 h1.5
Mechanical1:
  lines w0.2: 0,0 0,58.3 1.5,58.3
  lines w0.254: 0,0 33.7,0 33.7,58.3 32.2,58.3 ; 1.5,58.3 1.5,63.6 1.9,64 4.6,64 4.6,64.6 1.9,64.6 1.5,65 1.5,68.3 0,68.3 0,72.8 33.7,72.8 ; 23.7,72.8 33.7,72.8 ; 33.4,58.3 32.2,58.3 ; 33.4,68.3 32.2,68.3 ; 32.2,58.3 32.2,63.7 32.1,63.8 31.9,64 29.1,64 29.1,64.6 31.8,64.6 32.2,65 32.2,68.3 ; 32.2,68.3 33.7,68.3 ; 32.2,68.3 33.7,68.3 ; 32.2,68.3 33.7,68.3 ; 33.7,68.3 33.7,72.8

## Text inside footprints (layer, text, board x,y; h text height)
IC23: TopOverlay "AC(N)" at 16.233,15.637 h1.2 r90; TopOverlay "+Vo" at 18.96,47.075 h1.2 r90; TopOverlay "-Vo" at 26.96,47.075 h1.2 r90; TopOverlay "AC(L)" at 26.983,15.637 h1.2 r90; Mechanical14 "-Vo" at 26.96,47.075 h1.2 r90; Mechanical14 "+Vo" at 18.96,47.075 h1.2 r90; Mechanical14 "AC(N)" at 16.233,15.637 h1.2 r90; Mechanical14 "AC(L)" at 26.983,15.637 h1.2 r90; Mechanical8 "3" at 18.985,54.255 h1.2 r90; Mechanical8 "4" at 26.985,54.255 h1.2 r90; Mechanical8 "2" at 26.985,11.31 h1.2 r90; Mechanical8 "1" at 16.233,11.31 h1.2 r90
J36: TopOverlay "2" at 18.15,8.475 h1; TopOverlay "1" at 14.75,8.475 h1
J38: TopOverlay "1" at 7.125,66.5 h1.2; TopOverlay "5" at 6.825,58.52 h1.2; BottomOverlay "6" at 7.25,67.7 h1.2 r180; BottomOverlay "10" at 6.95,59.72 h1.2 r180
J39: TopOverlay "5" at 26.175,58.7 h1.2; TopOverlay "1" at 26.475,66.68 h1.2; BottomOverlay "10" at 25.3,59.9 h1.2 r180; BottomOverlay "6" at 26.35,67.88 h1.2 r180